# EAGLE board Board30x60 (EAGLE 7.5.0)
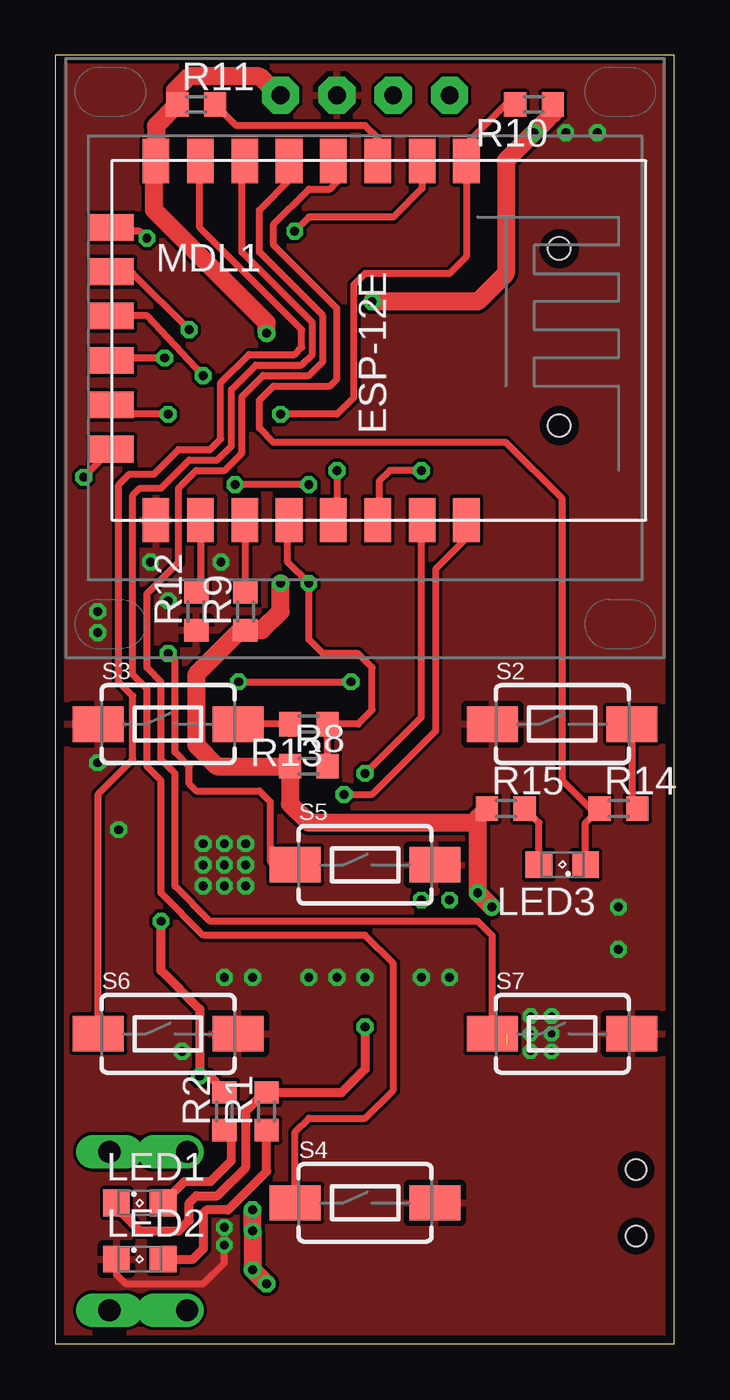
[diagram p0: board, top side]
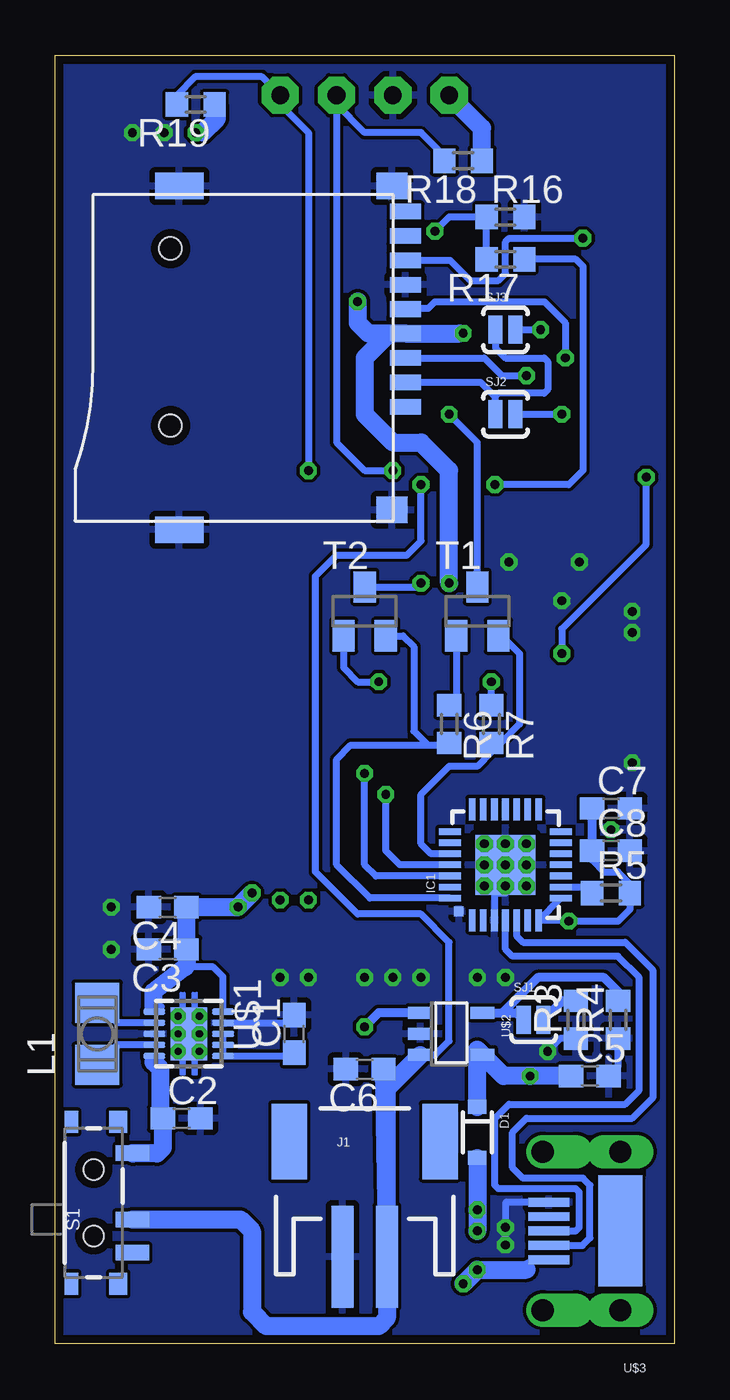
[diagram p1: board, bottom side, seen from below]

Size 27.92 x 58.09 mm. Coordinates in mm from the lower left corner, seen from the top.
Outline: 0,0 27.92,0 27.92,58.09 0,58.09 0,0
Copper layers (1*16): Top 0.0356mm / dielectric 1.5011mm / Bottom 0.0356mm
Design rules "oshpark-2layer": minimum track width 6mil, minimum drill 13mil, track to track 6mil, track to pad 6mil, pad to pad 6mil, via to via 6mil, smd to smd 6mil, copper to edge 15mil, drill to drill 6mil, minimum pad ring 7mil, minimum via ring 7mil, stop-mask expansion 2.5mil, vias tented up to drill 0mil, thermal gap 10mil

## Footprints (pad centres in the part's own frame; a part is rotated, then mirrored left to right if it is on the bottom)
C0603 = smd 1.1 x 1: 1 -0.85,0; 2 0.85,0
SOD-323 = smd 0.63 x 0.83: A 1.15,0; C -1.15,0
MLP28 = smd 1 x 0.3: 1 -2.5,1.5; 2 -2.5,1; 3 -2.5,0.5; 4 -2.5,0; 5 -2.5,-0.5; 6 -2.5,-1; 7 -2.5,-1.5; 15 2.5,-1.5; 16 2.5,-1; 17 2.5,-0.5; 18 2.5,0; 19 2.5,0.5; 20 2.5,1; 21 2.5,1.5 | smd 0.3 x 1: 8 -1.5,-2.5; 9 -1,-2.5; 10 -0.5,-2.5; 11 0,-2.5; 12 0.5,-2.5; 13 1,-2.5; 14 1.5,-2.5; 22 1.5,2.5; 23 1,2.5; 24 0.5,2.5; 25 0,2.5; 26 -0.5,2.5; 27 -1,2.5; 28 -1.5,2.5 | smd 2.7 x 2.7: EXP 0,0 | smd 0.435 x 0.435: M -2.103,2.103
JST-2-SMD = smd 1 x 4.6: 1 -1,-3.7; 2 1,-3.7 | smd 1.6 x 3.4: NC1 -3.4,1.5; NC2 3.4,1.5
L3225P = smd 1.8 x 2: 1 -1.4,0; 2 1.4,0
SML0805 = smd 1.2 x 1.2: A 1.05,0; C -1.05,0
ESP8266-ESP12E = smd 2 x 1.2: 1 0,16; 2 0,14; 3 0,12; 4 0,10; 5 0,8; 6 0,6; 7 0,4; 8 0,2; 9 16.2,2; 10 16.2,4; 11 16.2,6; 12 16.2,8; 13 16.2,10; 14 16.2,12; 15 16.2,14; 16 16.2,16 | smd 1.2 x 2: 17 11,0; 18 3,0; 19 5,0; 20 13,0; 21 7,0; 22 9,0
R0603 = smd 1 x 1.1: 1 -0.85,0; 2 0.85,0
SWITCH-SPST-SMD-A = smd 0.7 x 1.5: 1 -2.25,-1.75; 2 -0.75,-1.75; 3 2.25,-1.75 | smd 1 x 0.6: GND1 -3.65,1; GND3 3.65,1 | smd 1 x 0.8: GND2 -3.65,-1.1; GND4 3.65,-1.1 | hole 0.9: -1.5,0; 1.5,0
TACTILE-SWITCH-1101NE = smd 2.3 x 1.6: 1 -3.15,0; 2 3.15,0
SJ_2S-NO = smd 0.635 x 1.27: 1 -0.45,0; 2 0.45,0
SOT23 = smd 1 x 1.4: 1 -0.95,-1.1; 2 0.95,-1.1; 3 0,1.1
DSK10 = smd 0.28 x 1: 1 -1,-1.55; 2 -0.5,-1.55; 3 0,-1.55; 4 0.5,-1.55; 5 1,-1.55; 6 1,1.55; 7 0.5,1.55; 8 0,1.55; 9 -0.5,1.55; 10 -1,1.55 | smd 2.4 x 1.65: TH 0,0
SOT23-5 = smd 0.55 x 1.1: 1 -0.95,-1.3; 2 0,-1.3; 3 0.95,-1.3; 4 0.95,1.5; 5 -0.95,1.5
MICRO_USB_4_LEGS = smd 1.85 x 0.4: D+ 3.125,0; D- 3.125,0.65; GND 3.125,-1.3; ID 3.125,-0.65; VCC 3.125,1.3 | drill 1 pad 1.397 long: P$1 -0.1,3.575; P$2 -0.1,-3.575 | drill 1 pad 1.397 offset: P$3 3.4,3.575; P$5 3.4,-3.575 | smd 2 x 5: P$4 -0.1,0
MICRO_SD = smd 0.7 x 1.4: 1 2.2,5.65; 2 1.1,5.65; 3 0,5.65; 4 -1.1,5.65; 5 -2.2,5.65; 6 -3.3,5.65; 7 -4.4,5.65; 8 -5.5,5.65; CD -6.6,5.65 | smd 1.2 x 1.4: S1 -7.75,5.05; S3 6.85,5.05 | smd 1.2 x 2.2: S2 -7.75,-4.55; S4 7.75,-4.55 | hole 1: -4.93,-4.95; 3.05,-4.95
OLED-I2C = drill 0.8 pad 1.676 octagon: GND -1.27,11.85; SCL 1.27,11.85; SDA 3.81,11.85; VCC -3.81,11.85

## Placement (x,y rotation side)
C1  0.1µ  [C0603]  17.14,13.97 90 bottom
C2  10µ  [C0603]  22.23,10.16 0 bottom
C3  10µ  [C0603]  22.86,17.78 180 bottom
C4  10µ  [C0603]  22.86,19.68 180 bottom
C5  10µ  [C0603]  3.81,12.06 0 bottom
C6  10µ  [C0603]  13.97,12.38 180 bottom
C7  0.1µ  [C0603]  2.86,24.13 0 bottom
C8  1µ  [C0603]  2.86,22.23 0 bottom
D1  [SOD-323]  8.89,9.53 270 bottom
IC1  CP210X_USB_UART  [MLP28]  7.62,21.59 90 bottom
J1  [JST-2-SMD]  13.97,7.62 0 bottom
L1  1.5µH  [L3225P]  26.04,13.97 90 bottom
LED1  Charging  [SML0805]  3.81,6.35 0 top
LED2  Charged  [SML0805]  3.81,3.81 0 top
LED3  [SML0805]  22.86,21.59 180 top
MDL1  [ESP8266-ESP12E]  2.54,53.34 270 top
R1  [R0603]  9.53,10.48 90 top
R2  [R0603]  7.62,10.48 90 top
R3  2k  [R0603]  4.45,14.61 90 bottom
R4  10k  [R0603]  2.54,14.61 90 bottom
R5  4.7k  [R0603]  2.86,20.32 0 bottom
R6  10k  [R0603]  10.16,27.94 270 bottom
R7  10k  [R0603]  8.26,27.94 270 bottom
R8  10k  [R0603]  11.43,26.04 0 top
R9  10k  [R0603]  8.57,33.02 90 top
R10  10k  [R0603]  21.59,55.88 180 top
R11  10k  [R0603]  6.35,55.88 0 top
R12  10k  [R0603]  6.35,33.02 90 top
R13  470  [R0603]  11.43,27.94 180 top
R14  470  [R0603]  25.4,24.13 0 top
R15  470  [R0603]  20.32,24.13 0 top
R16  220k  [R0603]  7.62,50.8 0 bottom
R17  100k  [R0603]  7.62,48.9 180 bottom
R18  10k  [R0603]  9.53,53.34 180 bottom
R19  10k  [R0603]  21.59,55.88 180 bottom
S1  Power  [SWITCH-SPST-SMD-A]  26.19,6.35 90 bottom
S2  USER  [TACTILE-SWITCH-1101NE]  22.86,27.94 0 top
S3  FLASH  [TACTILE-SWITCH-1101NE]  5.08,27.94 0 top
S4  DOWN  [TACTILE-SWITCH-1101NE]  13.97,6.35 0 top
S5  UP  [TACTILE-SWITCH-1101NE]  13.97,21.59 0 top
S6  LEFT  [TACTILE-SWITCH-1101NE]  5.08,13.97 0 top
S7  RIGHT  [TACTILE-SWITCH-1101NE]  22.86,13.97 0 top
SJ1  Fast Charge  [SJ_2S-NO]  6.35,14.61 0 bottom
SJ2  HW CS  [SJ_2S-NO]  7.62,41.91 0 bottom
SJ3  SW CS  [SJ_2S-NO]  7.62,45.72 0 bottom
T1  BC846  [SOT23]  8.89,33.02 0 bottom
T2  BC846  [SOT23]  13.97,33.02 0 bottom
U$1  TPS6303X  [DSK10]  21.91,13.97 270 bottom
U$2  MCP73831  [SOT23-5]  10.16,13.97 270 bottom
U$3  MICRO-USB-B  [MICRO_USB_4_LEGS]  2.54,5.08 180 bottom
U$4  MICRO_SD_SOCKET  [MICRO_SD]  17.78,44.45 270 bottom
U$6  OLED-I2C  [OLED-I2C]  13.97,44.45 0 top

## Library data of the parts
C1-C8 L1 R1-R19 = rcl
D1 = SparkFun-DiscreteSemi; PROD_ID: DIO-09646
IC1 = SparkFun-DigitalIC
J1 = SparkFun-Connectors; BTM_NEG: -; BTM_POS: +; PROD_ID: CONN-11443; TOP_NEG: -; TOP_POS: +
LED1-LED3 = led
MDL1 = ESP8266-ESP12E
S1 = SparkFun-Electromechanical
S2-S7 = SparkFun-Electromechanical; PROD_ID: SWCH-00815
SJ1-SJ3 = SparkFun-Retired
T1 T2 = transistor
U$1 U$4 U$6 = OwnStuff
U$2 = GeekAmmo
U$3 = micro usb B - 4LEGS

## Nets
+3V3: C3.1 C4.1 MDL1.8 R8.1 R9.1 R10.1 R11.1 R15.1 R18.1 R19.1 U$1.1 U$1.10 U$4.4 U$6.VCC
+5V: C5.1 C7.1 C8.1 D1.C IC1.7 IC1.8 R2.2 R5.2 U$2.4
ADC: MDL1.2 R16.1 R17.2
CS: SJ2.1 SJ3.1 U$4.2
GND: C1.2 C2.2 C3.2 C4.2 C5.2 C6.2 C7.2 C8.2 IC1.3 IC1.EXP IC1.M J1.1 LED2.C MDL1.9 R3.1 R4.1 R12.1 R16.2 S2.1 S3.1 S4.2 S5.2 S6.2 S7.2 U$1.3 U$1.9 U$1.TH U$2.2 U$3.GND U$4.6 U$4.S1 U$4.S2 U$4.S3 U$4.S4 U$6.GND
GPIO0: MDL1.12 R8.2 R13.1 T2.3
GPIO10: MDL1.20 S5.1
GPIO12: MDL1.6 S4.1
GPIO13: MDL1.7 S6.1
GPIO14: MDL1.5 S7.1
GPIO16: LED3.C MDL1.4 R14.1
MISO: MDL1.18 U$4.7
MOSI: MDL1.21 U$4.3
N$1: L1.1 U$1.4
N$2: L1.2 U$1.2
N$3: IC1.9 R5.1
N$4: D1.A U$3.VCC
N$5: IC1.5 U$3.D-
N$6: C1.1 U$1.6 U$1.7 U$1.8
N$7: LED1.A R2.1
N$8: R4.2 SJ1.1 U$2.5
N$9: LED2.A R1.1
N$10: LED1.C R1.2 U$2.1
N$11: MDL1.11 R9.2
N$12: R3.2 SJ1.2
N$13: MDL1.3 R11.2
N$14: IC1.4 U$3.D+
N$15: IC1.28 R6.2 T2.2
N$16: R7.1 T2.1
N$17: C2.1 S1.3 U$1.5
N$18: R6.1 T1.1
N$19: IC1.24 R7.2 T1.2
N$20: MDL1.10 R12.2
N$21: R14.2 S2.2
N$22: R13.2 S3.2
N$23: MDL1.17 SJ2.2
N$24: LED3.A R15.2
N$25: MDL1.19 SJ3.2
NRST: MDL1.1 R10.2 T1.3
RX0: IC1.26 MDL1.15
SCK: MDL1.22 U$4.5
SCL: MDL1.13 R18.2 U$6.SCL
SDA: MDL1.14 R19.2 U$6.SDA
TX0: IC1.25 MDL1.16
V+: C6.1 J1.2 R17.1 S1.2 U$2.3
VDD: IC1.6

## Tracks (layer width: path | path; a pad name or v marks a point on that pad's centre or on a via)
+3V3  (via drill 0.4)
  Top 0.305: U$6.VCC 10.06,56.3 | 5.4,55.98 R11.1 | R10.1 22.23,55.66 22.23,55.24 22.44,55.46 | 4.45,53.24 MDL1.8 | v10.16,34.29 10.16,33.76 | R9.1 8.36,32.17 | 18.84,23.5 R15.1
  Top 0.813: R11.1 4.54,54.92 MDL1.8 | 10.06,56.3 9.21,57.15 6.03,57.15 5.4,56.52 5.4,55.98 | v14.29,46.99 19.05,46.99 20.32,48.26 20.32,53.34 v21.59,54.61 22.23,55.24 | R10.1 22.44,55.46 | v9.53,45.56 9.53,46.04 4.45,51.12 4.45,53.24 | 8.36,32.17 6.35,30.16 6.35,26.99 7.3,26.04 R8.1 10.58,24.34 11.43,23.5 18.84,23.5 | R15.1 19.05,23.71 v19.05,20.32 v19.68,19.68 | R9.1 9.31,32.17 10.16,33.02 v10.16,34.29
  Bottom 0.305: 23.5,15.24 23.14,15.2 U$1.1 23.18,15.01 23.5,15.88 | U$1.10 20.36,16.55 20.8,16.99 22.07,16.99 | v21.59,54.61 21.27,54.61 | 20.64,55.78 R19.1 | 9.7,45.55 v9.53,45.56 | U$4.4 12.87,45.55
  Bottom 0.813: 23.5,15.24 23.5,15.88 22.07,16.99 22.01,17.04 C3.1 C4.1 v19.68,19.68 v19.05,20.32 | R18.1 8.68,54.81 U$6.VCC | v14.29,46.99 14.29,46.04 13.8,45.55 U$4.4 9.7,45.55 | 21.27,54.61 20.64,55.24 20.64,55.78 | 12.87,45.55 13.97,44.45 13.97,41.91 12.7,40.64 11.43,40.64 10.16,39.37 v10.16,34.29
+5V  (via drill 0.4)
  Top 0.406: R2.2 6.99,12.06 v6.51,12.06 6.51,15.08 4.76,16.83 v4.76,19.05
  Bottom 0.305: C8.1 3.71,21.8 3.17,21.27 2.54,21.27 2.01,20.74 R5.2 2.01,19.58 2.54,19.05 v4.76,19.05 | IC1.8 IC1.7 4.8,19.09
  Bottom 0.406: 4.8,19.09 v4.76,19.05 | C8.1 C7.1
  Bottom 0.813: D1.C 8.89,13.25 U$2.4 7.71,12.06 v6.51,12.06 C5.1
ADC  (via drill 0.4)
  Top 0.305: MDL1.2 16.54,52.1 15.24,50.8 11.43,50.8 v10.79,50.16
  Bottom 0.305: v10.79,50.16 10.16,50.8 R16.1 R17.2
CS
  Bottom 0.305: SJ3.1 8.07,44.9 7.62,44.45 5.87,44.45 5.71,44.29 5.71,43.02 5.87,42.86 7.94,42.86 8.1,42.7 | 8.1,42.7 8.1,41.94 SJ2.1 | U$4.2 8.74,43.35 8.1,42.7
GND  (via drill 0.33, 0.4)
  Top 0.305: LED2.C 2.76,3.11 3.17,2.7 6.67,2.7 7.62,3.65 v7.62,4.45
  Bottom 0.305: U$1.9 17.5,14.47 C1.2 | R3.1 5.14,13.76 v5.71,13.18 | R4.1 2.54,12.48 C5.2 | IC1.3 8.1,19.09 8.1,20.32 7.62,20.32 v7.62,20.64 | U$3.GND 7.59,6.38 7.62,6.35 v7.62,5.24 7.62,5.08 v7.62,4.45
  other vias: 4.29,35.24 1.91,33.02 1.91,26.19 17.78,16.51 16.51,16.51 13.97,16.51 12.7,16.51 11.43,16.51 8.89,16.51 7.62,16.51 1.91,32.07 5.08,33.5 7.46,35.24 7.62,21.59 2.86,23.18 6.67,22.54 7.62,22.54 8.57,22.54 6.67,21.59 8.57,21.59 6.67,20.64 8.57,20.64 21.43,14.76 22.38,14.76 21.43,13.97 22.38,13.97 21.43,13.18 22.38,13.18 23.02,54.61 24.45,54.61 25.4,19.68 25.4,17.78
  pour Top: 0,0 27.94,0 27.94,58.1 0,58.1
  pour Bottom: 0,0 27.94,0 27.94,58.1 0,58.1
GPIO0  (via drill 0.4)
  Top 0.305: MDL1.12 10.48,37.08 10.48,35.24 v11.43,34.29 11.43,31.75 12.06,31.11 13.65,31.11 14.29,30.48 14.29,28.57 13.65,27.94 R13.1 R8.2
  Bottom 0.305: T2.3 11.6,34.12 v11.43,34.29
GPIO10  (via drill 0.4)
  Top 0.305: S5.1 9.84,21.59 9.68,21.75 9.68,24.45 9.21,24.92 6.35,24.92 6.03,25.24 6.03,26.04 5.4,26.67 5.4,30.8 v5.08,31.11 | v1.27,39.07 MDL1.20
  Bottom 0.305: v1.27,39.07 1.27,36.04 5.08,32.23 v5.08,31.11
GPIO12
  Top 0.305: S4.1 10.82,9.55 11.43,10.16 13.97,10.16 15.24,11.43 15.24,17.14 13.97,18.41 6.67,18.41 4.76,20.32 4.76,25.4 4.13,26.04 4.13,29.53 3.49,30.16 3.49,38.26 3.81,38.58 4.76,38.58 6.03,39.85 7.3,39.85 7.94,40.48 7.94,43.02 9.05,44.13 11.11,44.13 11.59,44.61 11.59,46.04 8.41,49.21 8.41,53.21 MDL1.6
GPIO13
  Top 0.305: S6.1 1.93,24.79 3.49,26.35 3.49,29.21 2.86,29.84 2.86,38.73 3.33,39.21 4.45,39.21 5.56,40.32 6.99,40.32 7.46,40.8 7.46,43.34 8.73,44.61 10.79,44.61 11.11,44.93 11.11,45.72 6.51,50.32 6.51,53.31 MDL1.7
GPIO14
  Top 0.305: S7.1 19.71,18.39 19.05,19.05 6.99,19.05 5.4,20.64 5.4,25.72 4.76,26.35 4.76,29.84 4.13,30.48 4.13,33.81 5.56,35.24 5.56,38.58 6.35,39.37 7.62,39.37 8.41,40.16 8.41,42.7 9.37,43.66 11.43,43.66 12.06,44.29 12.06,46.35 9.21,49.21 9.21,51.12 10.64,52.55 10.64,53.24 MDL1.5
GPIO16
  Top 0.305: LED3.C 23.91,23.49 R14.1 24.13,24.13 22.86,25.4 22.86,38.1 20.32,40.64 9.84,40.64 9.21,41.27 9.21,42.55 9.84,43.18 12.38,43.18 12.7,43.5 12.7,46.67 9.84,49.53 9.84,50.48 11.43,52.07 12.38,52.07 12.7,52.39 12.7,53.18 MDL1.4
MISO  (via drill 0.4)
  Top 0.305: MDL1.18 2.71,50.16 3.81,50.16 v4.13,49.85
  Bottom 0.305: U$4.7 10.12,48.85 9.21,47.94 7.94,47.94 7.62,48.26 7.62,49.69 7.46,49.85 v4.13,49.85
MOSI  (via drill 0.4)
  Top 0.305: v6.67,43.66 4.13,46.35 2.56,46.35 MDL1.21
  Bottom 0.305: U$4.3 8.57,44.45 7.78,43.66 v6.67,43.66
N$1
  Bottom 0.305: U$1.4 25.14,13.47 L1.1
N$2
  Bottom 0.305: U$1.2 25.14,14.47 L1.2
N$3
  Bottom 0.305: IC1.9 3.98,20.59 R5.1
N$4  (via drill 0.4)
  Top 0.813: v9.53,2.7 v8.89,3.33 v8.89,5.08 v8.89,6.03
  Bottom 0.305: 6.67,3.33 6.67,3.59 6.38,3.78 U$3.VCC
  Bottom 0.813: D1.A v8.89,6.03 v8.89,5.08 | v9.53,2.7 v8.89,3.33 6.67,3.33
N$5
  Bottom 0.305: IC1.5 7.12,18.39 6.83,18.1 2.22,18.1 0.95,16.83 0.95,11.11 1.91,10.16 6.67,10.16 7.3,9.53 7.3,7.94 6.83,7.46 4.13,7.46 3.81,7.14 3.81,4.76 4.14,4.43 U$3.D-
N$6  (1 unrouted)
  Bottom 0.305: U$1.8 U$1.6 17.3,12.97 C1.1
N$7
  Top 0.406: R2.1 7.94,9.63 7.94,8.26 6.99,7.3 5.81,7.3 LED1.A
N$8
  Bottom 0.406: U$2.5 7.75,14.92 | R4.2 2.54,15.88 3.17,16.51 6.16,16.51 7.75,14.92 | 7.75,14.92 7.12,14.92 SJ1.1
N$9
  Top 0.406: 9.21,9.63 R1.1 9.53,7.78 7.78,6.03 6.83,6.03 6.67,5.87 6.67,4.29 6.19,3.81 LED2.A
N$10  (via drill 0.4)
  Top 0.406: LED1.C 2.76,6.13 3.81,5.08 5.56,5.08 6.03,5.56 6.03,6.35 6.35,6.67 7.3,6.67 8.57,7.94 8.57,10.48 9.42,11.33 R1.2 12.91,11.33 13.97,12.38 v13.97,14.29
  Bottom 0.406: U$2.1 13.34,14.92 v13.97,14.29
N$11
  Top 0.305: R9.2 8.57,37.11 MDL1.11
N$12
  Bottom 0.406: R3.2 5.05,15.46 SJ1.2
N$13
  Top 0.305: MDL1.3 14.54,54.36 13.97,54.93 8.15,54.93 R11.2
N$14
  Bottom 0.305: IC1.4 7.62,17.78 7.3,17.46 2.54,17.46 1.59,16.51 1.59,11.43 2.22,10.79 7.46,10.79 8.1,10.16 8.1,7.14 7.94,6.99 4.45,6.99 4.29,6.83 4.29,5.24 4.45,5.08 U$3.D+
N$15
  Bottom 0.305: IC1.28 13.74,20.09 15.24,21.59 15.24,26.35 14.61,26.99 11.11,26.99 | 10.38,27.09 R6.2 10.58,26.99 11.11,26.99 | T2.2 12.23,31.92 11.75,31.43 11.75,27.62 11.11,26.99
N$16  (via drill 0.4)
  Top 0.305: v8.26,29.84 v13.34,29.84
  Bottom 0.305: R7.1 v8.26,29.84 | T2.1 14.92,30.48 14.29,29.84 v13.34,29.84
N$17
  Bottom 0.305: 23.5,12.7 23.73,12.7 U$1.5
  Bottom 0.813: 23.5,12.7 23.18,12.38 23.18,10.16 C2.1 23.07,8.83 23.34,8.57 24.42,8.57 S1.3
N$18
  Bottom 0.305: T1.1 9.84,29.11 R6.1
N$19
  Bottom 0.305: IC1.24 10.98,22.09 11.43,22.54 11.43,24.77 10.16,26.04 8.89,26.04 8.26,26.67 R7.2 7.83,27.09 6.99,27.94 6.99,31.11 7.79,31.92 T1.2
N$20
  Top 0.305: MDL1.10 6.54,34.06 R12.2
N$21
  Top 0.305: S2.2 26.01,24.37 R14.2
N$22
  Top 0.305: R13.2 S3.2
N$23  (via drill 0.4)
  Top 0.305: v5.08,41.91 2.97,41.91 MDL1.17
  Bottom 0.305: SJ2.2 v5.08,41.91
N$24
  Top 0.305: LED3.A 21.81,23.49 R15.2
N$25  (via drill 0.4)
  Top 0.305: v6.03,45.72 3.49,48.26 2.62,48.26 MDL1.19
  Bottom 0.305: SJ3.2 v6.03,45.72
N$39  (via drill 0.4)
  other vias: 16.51,20
N$40  (via drill 0.4)
  other vias: 17.78,20
NRST  (via drill 0.4)
  Top 0.305: v10.16,41.91 12.7,41.91 13.46,42.67 13.46,47.75 13.97,48.26 17.78,48.26 18.54,49.02 MDL1.1 18.41,53.47 18.41,53.98 20.32,55.88 R10.2
  Bottom 0.305: T1.3 8.89,40.64 v10.16,41.91
RX0  (via drill 0.4)
  Top 0.305: v13.97,25.72 16.51,28.26 16.51,37.11 MDL1.15
  Bottom 0.305: IC1.26 13.47,21.09 13.97,21.59 v13.97,25.72
SCK  (via drill 0.4)
  Top 0.305: v4.92,44.45 2.65,44.45 MDL1.22
  Bottom 0.305: v4.92,44.45 4.92,46.04 5.85,46.97 10.82,46.97 11.11,46.67 12.11,46.67 U$4.5
SCL  (via drill 0.4)
  Top 0.305: v12.7,39.37 12.7,37.3 MDL1.13
  Bottom 0.305: 15.24,55.88 15.24,40.64 13.97,39.37 v12.7,39.37 | R18.2 10.38,53.55 11.43,54.61 13.97,54.61 15.24,55.88 | 15.24,55.88 U$6.SCL
SDA  (via drill 0.4)
  Top 0.305: 14.61,37.39 MDL1.14 14.61,37.2 14.61,38.89 15.08,39.37 v16.51,39.37
  Bottom 0.305: v16.51,39.37 16.51,54.61 17.78,55.88 U$6.SDA 18.63,57.15 21.59,57.15 22.44,56.3 R19.2
TX0  (via drill 0.4)
  Top 0.305: v13.02,24.77 14.29,24.77 17.14,27.62 17.14,34.92 18.54,36.32 MDL1.16
  Bottom 0.305: IC1.25 12.38,21.59 13.02,22.23 v13.02,24.77
V+  (via drill 0.4)
  Top 0.305: v11.43,38.73 v8.1,38.73
  Bottom 0.305: U$2.3 10.79,13.02 10.16,13.65 10.16,18.1 11.43,19.37 14.29,19.37 16.19,21.27 16.19,34.61 15.24,35.56 12.06,35.56 11.43,36.2 v11.43,38.73 | R17.1 4.45,48.9 4.13,48.58 4.13,39.37 4.76,38.73 v8.1,38.73
  Bottom 0.813: S1.2 19.57,5.6 19.05,5.08 19.05,1.43 18.41,0.79 13.34,0.79 12.97,1.16 J1.2 | J1.2 12.97,11.51 U$2.3 | C6.1 J1.2